# EAGLE board PCB (EAGLE 9.7.0)
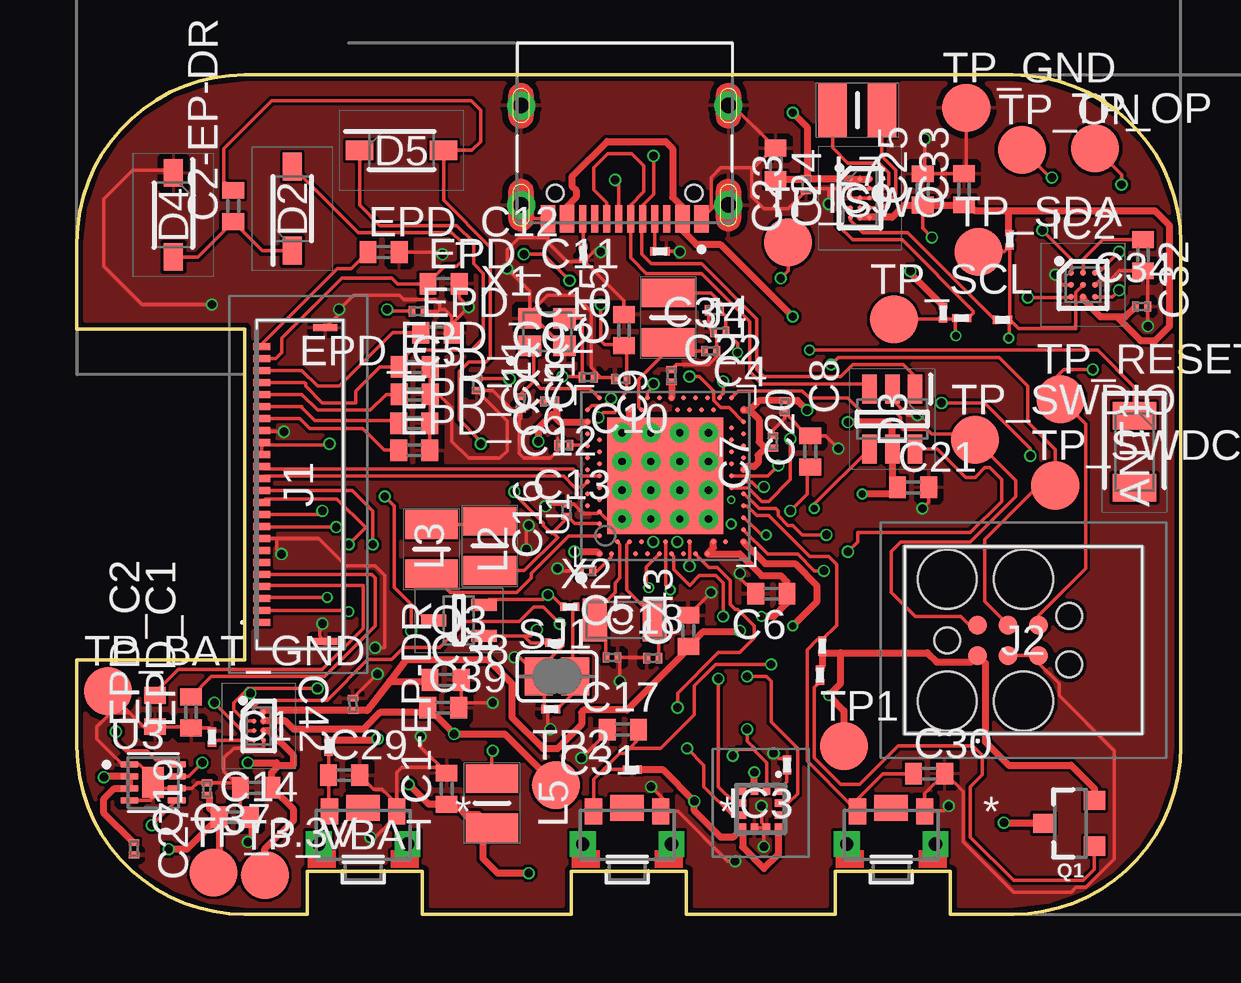
[diagram p0: board, top side]
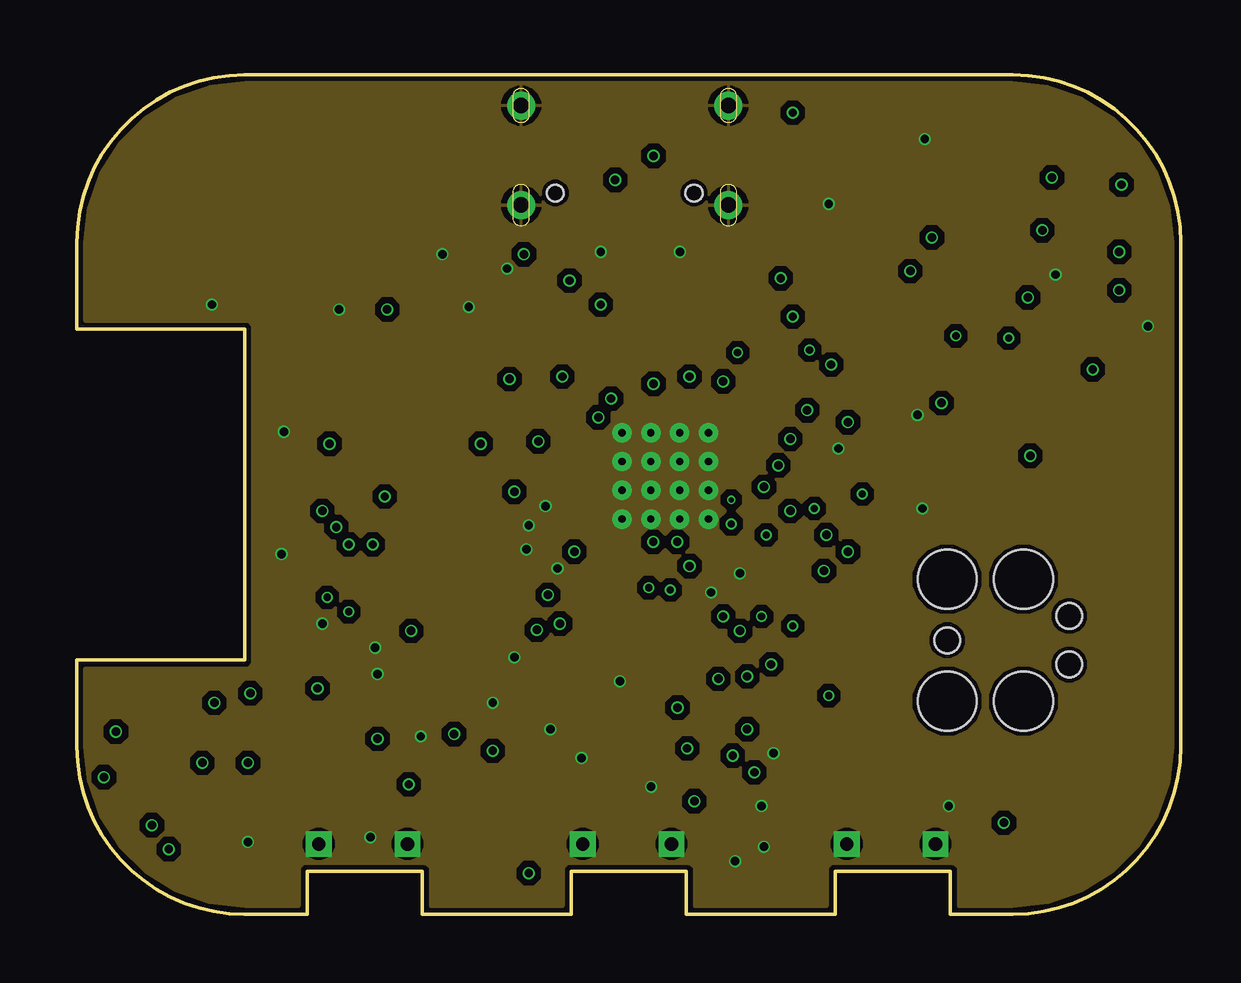
[diagram p1: board, inner layer GND]
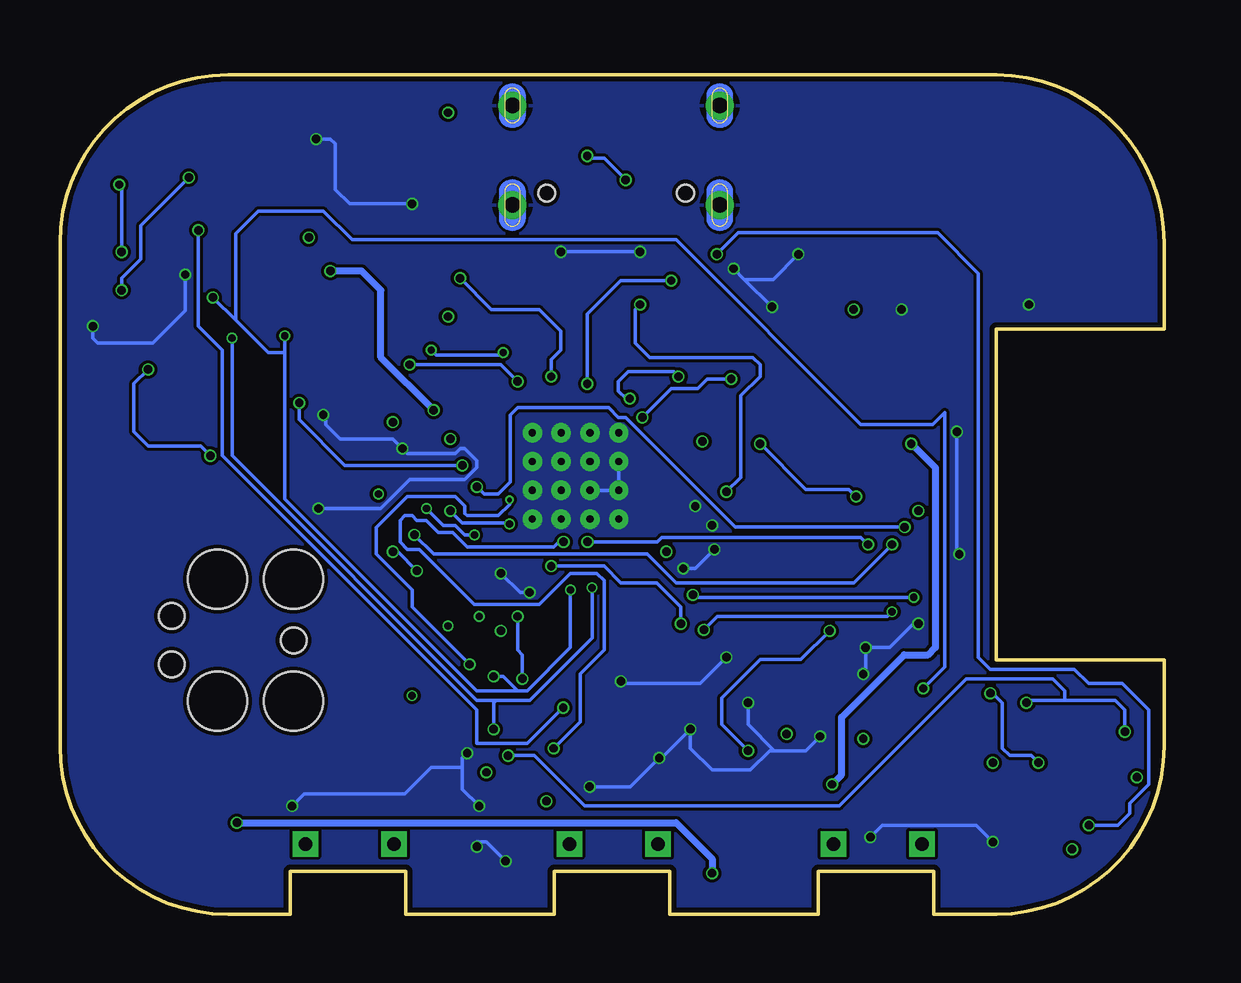
[diagram p2: board, bottom side, seen from below]

Size 46 x 35 mm. Coordinates in mm from the lower left corner, seen from the top.
Outline: 39,0 36.4,0 36.4,1.8 31.6,1.8 31.6,0 25.4,0 25.4,1.8 20.6,1.8 20.6,0 14.4,0 14.4,1.8 9.6,1.8 9.6,0 7,0 arc-90 0,7 0,10.6 7,10.6 7,24.4 0,24.4 0,28 arc-90 7,35 39,35 arc-90 46,28 46,7 arc-90 39,0
Copper layers (1+2*63+16): Top / GND / Bottom / layer 63
Stack-up 4 Layer Stack: Top SilkScreen Epoxy Ink / Top SolderMask User Defined 0.02mm Dk 4.3 / Top Surface Finish Lead-Free 0.02mm / Top User Defined 0.03mm / Dielectric-1 User Defined 0.034mm / Dielectric-2 User Defined 0.034mm / GND User Defined 0.03mm / Dielectric-3 User Defined 0.664mm / Power User Defined 0.03mm / Dielectric-4 User Defined 0.034mm / Dielectric-5 User Defined 0.034mm / Bottom User Defined 0.03mm / Bottom Surface Finish Lead-Free 0.02mm / Bottom SolderMask User Defined 0.02mm Dk 4.3 / Bottom SilkScreen Epoxy Ink
Design rules: minimum copper width 5mil, minimum drill size 0.3mm, copper clearance wire_polygon to wire_polygon 5mil, copper clearance wire_polygon to pad_smd 5mil, copper clearance wire_polygon to via 5mil, copper clearance pad_smd to pad_smd 5mil, copper clearance pad_smd to via 5mil, copper clearance via to via 5mil, copper clearance smd to pad (same net) 5mil, copper clearance smd to via (same net) 5mil, copper clearance smd to smd (same net) 5mil, dimension clearance 0.2mm, via restrict clearance 0mil, restrict clearance 0mil, drill distance 6mil, keepout clearance 0mil

## Footprints (pad centres in the part's own frame; a part is rotated, then mirrored left to right if it is on the bottom)
2450AT18B100E_ANTC3216X140N = smd 1.15 x 1.8: 1 -1.5,0; 2 1.5,0
NORDIC_NRF_3_RESC0201_L = smd 0.28 x 0.43: 1 -0.255,0; 2 0.255,0
ESP32_C6_LIBRARY_1_ESP32_WROVER_EAGLE-LTSPICE_C0402 = smd 0.7 x 0.9: 1 -0.65,0; 2 0.65,0
ESP32_C6_LIBRARY_5_SOD3716X135N = smd 1.15 x 0.8: 1 -1.75,0; 2 1.75,0
ESP32_C6_LIBRARY_3_SOT95P280X145-6N = smd 1.2 x 0.6: 1 -1.25,0.95; 2 -1.25,0; 3 -1.25,-0.95; 4 1.25,-0.95; 5 1.25,0; 6 1.25,0.95
BQ25180YBGR_BGA8C40P2X4_100X155X50 = smd 0.2 x 0.2: A1 -0.2,0.6; A2 0.2,0.6; B1 -0.2,0.2; B2 0.2,0.2; C1 -0.2,-0.2; C2 0.2,-0.2; D1 -0.2,-0.6; D2 0.2,-0.6
DRV2605YZFR_BGA9C50P3X3_144X144X62 = smd 0.25 x 0.25: A1 -0.5,0.5; A2 0,0.5; A3 0.5,0.5; B1 -0.5,0; B2 0,0; B3 0.5,0; C1 -0.5,-0.5; C2 0,-0.5; C3 0.5,-0.5
BMA423_BMA423 = smd 0.3 x 0.35: 1 -0.75,-0.775; 2 -0.25,-0.775; 3 0.25,-0.775; 4 0.75,-0.775; 7 0.75,0.775; 8 0.25,0.775; 9 -0.25,0.775; 10 -0.75,0.775 | smd 0.35 x 0.3: 5 0.775,-0.25; 6 0.775,0.25; 11 -0.775,0.25; 12 -0.775,-0.25
RT6160AWSC_BGA15C40P3X5_140X230X60 = smd 0.216 x 0.216: A1 -0.4,0.8; A2 0,0.8; A3 0.4,0.8; B1 -0.4,0.4; B2 0,0.4; B3 0.4,0.4; C1 -0.4,0; C2 0,0; C3 0.4,0; D1 -0.4,-0.4; D2 0,-0.4; D3 0.4,-0.4; E1 -0.4,-0.8; E2 0,-0.8; E3 0.4,-0.8
503480-2400_5034802400 = smd 0.3 x 0.7: 1 -5.75,1.525; 2 -5.25,1.525; 3 -4.75,1.525; 4 -4.25,1.525; 5 -3.75,1.525; 6 -3.25,1.525; 7 -2.75,1.525; 8 -2.25,1.525; 9 -1.75,1.525; 10 -1.25,1.525; 11 -0.75,1.525; 12 -0.25,1.525; 13 0.25,1.525; 14 0.75,1.525; 15 1.25,1.525; 16 1.75,1.525; 17 2.25,1.525; 18 2.75,1.525; 19 3.25,1.525; 20 3.75,1.525; 21 4.25,1.525; 22 4.75,1.525; 23 5.25,1.525; 24 5.75,1.525 | smd 0.3 x 1: MP1 -6.54,-1.125; MP2 6.54,-1.125
TC2030-IDC_TC2030IDC = smd 0.783 x 0.783: 1 -0.953,-0.635; 2 -0.953,0.635; 3 0.317,-0.635; 4 0.317,0.635; 5 1.588,-0.635; 6 1.588,0.635 | hole 2.451: -2.223,-2.54; -2.223,2.54; 0.952,-2.54; 0.952,2.54 | hole 1.067: -2.223,0; 2.857,-1.016; 2.857,1.016
KH-TYPE-C-16P_KINGHELM_KH-TYPE-C-16P = smd 0.6 x 1.15: A1_B12 -3.2,4.725; A4_B9 -2.4,4.725; A9_B4 2.4,4.725; A12_B1 3.2,4.725 | smd 0.3 x 1.15: A5 -1.25,4.725; A6 -0.25,4.725; A7 0.25,4.725; A8 1.25,4.725; B5 1.75,4.725; B6 0.75,4.725; B7 -0.75,4.725; B8 -1.75,4.725 | drill 0.65 pad 1.05: SH1 -4.32,0; SH2 4.32,0; SH3 -4.32,4.15; SH4 4.32,4.15 | hole 0.7: -2.89,3.65; 2.89,3.65
MLP2016SR47MT0S1_INDC2016X100N = smd 1.2 x 2.2: 1 -1.028,0; 2 1.028,0
ESP32_C6_LIBRARY_4_ESP32_C6_LIBRARY_4_ESP32_C6_LIBRARY_4_ESP32_C6_LIBRARY_4_ESP32_WROVER_SPARKFUN-DISCRETESEMI_SOT23-3 = smd 0.8 x 0.9: 1 -0.95,-1; 2 0.95,-1; 3 0,1.1
ESP32_C6_LIBRARY_6_SOT65P210X110-3N = smd 1.05 x 0.5: 1 -1.05,0.65; 2 -1.05,-0.65; 3 1.05,0
CPF0201D7K68C1_0201 = smd 0.35 x 0.25: 1 0,0.275; 2 0,-0.275
ERA-1AEB3401C_0201 = smd 0.35 x 0.25: 1 0,0.275; 2 0,-0.275
ESP32_C6_LIBRARY_7_JUMPER_SJ = smd 1.168 x 1.6: 1 -0.762,0; 2 0.762,0
2025-10-22_07-23-44_LIBRARY_SW_EVP-AKE31A_PAN = smd 0.711 x 1.092: 1 -1.4,-0.972; 2 1.4,-0.972 | drill 0.559 pad 0.914 square: 3 -1.848,0.381; 4 1.848,0.381 | smd 1.397 x 1.092: 5 0,-1.124
HECTOR_WATCH_1_TP20R = smd 2 x 2: TP 0,0
NORDIC_NRF_4_AQFN50P700X700X85_HS-74N = smd 4.85 x 4.85: P$74 0,0 | drill 0.3 pad 0.6: P$75 -1.8,1.8; P$76 -0.6,1.8; P$77 0.6,1.8; P$78 1.8,1.8; P$79 -1.8,0.6; P$80 -0.6,0.6; P$81 0.6,0.6; P$82 1.8,0.6; P$83 -1.8,-0.6; P$84 -0.6,-0.6; P$85 0.6,-0.6; P$86 1.8,-0.6; P$87 -1.8,-1.8; P$88 -0.6,-1.8; P$89 0.6,-1.8; P$90 1.8,-1.8 | smd 0.2 x 0.2: P$A8 -1.25,3.25; P$A10 -0.75,3.25; P$A12 -0.25,3.25; P$A14 0.25,3.25; P$A16 0.75,3.25; P$A18 1.25,3.25; P$A20 1.75,3.25; P$A22 2.25,3.25; P$A23 2.75,3.25; P$AA24 3.25,-2.25; P$AB2 -2.75,-2.5; P$AC5 -2,-2.75; P$AC9 -1,-2.75; P$AC11 -0.5,-2.75; P$AC13 0,-2.75; P$AC15 0.5,-2.75; P$AC17 1,-2.75; P$AC19 1.5,-2.75; P$AC21 2,-2.75; P$AC24 3.25,-2.75; P$AD2 -2.75,-3.25; P$AD4 -2.25,-3.25; P$AD6 -1.75,-3.25; P$AD8 -1.25,-3.25; P$AD10 -0.75,-3.25; P$AD12 -0.25,-3.25; P$AD14 0.25,-3.25; P$AD16 0.75,-3.25; P$AD18 1.25,-3.25; P$AD20 1.75,-3.25; P$AD22 2.25,-3.25; P$AD23 2.75,-3.25; P$B1 -3.25,2.75; P$B3 -2.5,2.75; P$B5 -2,2.75; P$B7 -1.5,2.75; P$B9 -1,2.75; P$B11 -0.5,2.75; P$B13 0,2.75; P$B15 0.5,2.75; P$B17 1,2.75; P$B19 1.5,2.75; P$B24 3.25,2.75; P$C1 -3.25,2.25; P$D2 -2.75,2; P$D23 2.75,2; P$E24 3.25,1.75; P$F2 -2.75,1.5; P$F23 2.75,1.5; P$G1 -3.25,1.25; P$H2 -2.75,1; P$H23 2.75,1; P$J1 -3.25,0.75; P$J24 3.25,0.75; P$K2 -2.75,0.5; P$L1 -3.25,0.25; P$L24 3.25,0.25; P$M2 -2.75,0; P$N1 -3.25,-0.25; P$N24 3.25,-0.25; P$P2 -2.75,-0.5; P$P23 2.75,-0.5; P$R1 -3.25,-0.75; P$R24 3.25,-0.75; P$T2 -2.75,-1; P$T23 2.75,-1; P$U1 -3.25,-1.25; P$U24 3.25,-1.25; P$V23 2.75,-1.5; P$W1 -3.25,-1.75; P$W24 3.25,-1.75; P$Y2 -2.75,-2; P$Y23 2.75,-2
ESP32_C6_LIBRARY_SON50P200X200X80-9N = smd 0.76 x 0.27: 1 -0.985,0.75; 2 -0.985,0.25; 3 -0.985,-0.25; 4 -0.985,-0.75; 5 0.985,-0.75; 6 0.985,-0.25; 7 0.985,0.25; 8 0.985,0.75 | smd 0.9 x 1.3: 9 0,0
NORDIC_NRF_BT-XTAL_2016_N = smd 0.95 x 0.85: 1 -0.725,-0.575; 2 0.725,-0.575; 3 0.725,0.575; 4 -0.725,0.575
NORDIC_NRF_1_XTAL_3215_N = smd 1 x 1.8: 1 -1.25,0; 2 1.25,0

## Placement (x,y rotation side)
ANT1  2450AT18B100E  [2450AT18B100E_ANTC3216X140N]  44.07,19.28 270 top
C1  12pF  [NORDIC_NRF_3_RESC0201_L]  18.5,21.32 270 top
C1-EP-DR  10uF  [ESP32_C6_LIBRARY_1_ESP32_WROVER_EAGLE-LTSPICE_C0402]  15.41,5.24 90 top
C2  12pF  [NORDIC_NRF_3_RESC0201_L]  21.31,22.39 0 top
C2-EP-DR  4.7uF/25V  [ESP32_C6_LIBRARY_1_ESP32_WROVER_EAGLE-LTSPICE_C0402]  6.52,29.53 90 top
C3  1pF  [NORDIC_NRF_3_RESC0201_L]  26.41,23.48 0 top
C4  1pF  [NORDIC_NRF_3_RESC0201_L]  26.79,24.28 180 top
C5  100nF  [NORDIC_NRF_3_RESC0201_L]  21.24,14.32 180.3 top
C6  4.7uF  [ESP32_C6_LIBRARY_1_ESP32_WROVER_EAGLE-LTSPICE_C0402]  28.94,13.37 180 top
C7  100nF  [NORDIC_NRF_3_RESC0201_L]  29.01,19.7 90 top
C8  100nF  [NORDIC_NRF_3_RESC0201_L]  29.5,21.17 270 top
C9  820pF  [NORDIC_NRF_3_RESC0201_L]  24.78,22.46 90 top
C10  N.C.  [NORDIC_NRF_3_RESC0201_L]  22.67,22.32 180 top
C11  100pF  [NORDIC_NRF_3_RESC0201_L]  16.67,22.09 270 top
C12  100nF  [NORDIC_NRF_3_RESC0201_L]  19.7,21.38 180 top
C13  N.C.  [NORDIC_NRF_3_RESC0201_L]  20.29,19.56 180 top
C14  4.7uF  [ESP32_C6_LIBRARY_1_ESP32_WROVER_EAGLE-LTSPICE_C0402]  6.58,4.06 0 top
C15  1.0uF  [ESP32_C6_LIBRARY_1_ESP32_WROVER_EAGLE-LTSPICE_C0402]  22.8,24.36 90 top
C16  47nF  [NORDIC_NRF_3_RESC0201_L]  20.4,16.85 90 top
C17  12pF  [NORDIC_NRF_3_RESC0201_L]  22.3,10.71 180 top
C18  12pF  [NORDIC_NRF_3_RESC0201_L]  24,10.68 0 top
C19  100nF  [NORDIC_NRF_3_RESC0201_L]  5.42,5.23 90 top
C20  4.7uF  [ESP32_C6_LIBRARY_1_ESP32_WROVER_EAGLE-LTSPICE_C0402]  30.56,19.3 90 top
C21  4.7uF  [ESP32_C6_LIBRARY_1_ESP32_WROVER_EAGLE-LTSPICE_C0402]  34.85,17.8 0 top
C22  N.C.  [NORDIC_NRF_3_RESC0201_L]  26.56,25.18 180 top
C23  0.1uF  [NORDIC_NRF_3_RESC0201_L]  30.39,30.42 90 top
C24  10uF  [ESP32_C6_LIBRARY_1_ESP32_WROVER_EAGLE-LTSPICE_C0402]  29.12,31.29 270 top
C25  22uF  [ESP32_C6_LIBRARY_1_ESP32_WROVER_EAGLE-LTSPICE_C0402]  35.25,30.22 90 top
C27  0.1uF  [NORDIC_NRF_3_RESC0201_L]  2.38,2.74 270 top
C29  1uF  [ESP32_C6_LIBRARY_1_ESP32_WROVER_EAGLE-LTSPICE_C0402]  11.14,5.81 0 top
C30  1uF  [ESP32_C6_LIBRARY_1_ESP32_WROVER_EAGLE-LTSPICE_C0402]  35.51,5.87 0 top
C31  1uF  [ESP32_C6_LIBRARY_1_ESP32_WROVER_EAGLE-LTSPICE_C0402]  22.75,7.71 180 top
C32  1uF  [ESP32_C6_LIBRARY_1_ESP32_WROVER_EAGLE-LTSPICE_C0402]  44.43,27.48 270 top
C33  22uF  [ESP32_C6_LIBRARY_1_ESP32_WROVER_EAGLE-LTSPICE_C0402]  36.97,30.23 90 top
C34  0.1uF  [NORDIC_NRF_3_RESC0201_L]  44.37,25.34 0 top
C37  1uF  [ESP32_C6_LIBRARY_1_ESP32_WROVER_EAGLE-LTSPICE_C0402]  7.47,5.28 180 top
C38  1uF  [ESP32_C6_LIBRARY_1_ESP32_WROVER_EAGLE-LTSPICE_C0402]  15.37,9.77 0 top
C39  10uF  [ESP32_C6_LIBRARY_1_ESP32_WROVER_EAGLE-LTSPICE_C0402]  15.27,8.62 0 top
C42  0.1uF  [NORDIC_NRF_3_RESC0201_L]  11.51,8.75 91.1 top
C43  4.7uF  [ESP32_C6_LIBRARY_1_ESP32_WROVER_EAGLE-LTSPICE_C0402]  25.48,11.82 90 top
D2  MBR0530  [ESP32_C6_LIBRARY_5_SOD3716X135N]  8.98,29.42 90 top
D3  USBLC6-2SC6Y  [ESP32_C6_LIBRARY_3_SOT95P280X145-6N]  33.98,20.65 270 top
D4  MBR0530  [ESP32_C6_LIBRARY_5_SOD3716X135N]  4.02,29.16 270 top
D5  MBR0530  [ESP32_C6_LIBRARY_5_SOD3716X135N]  13.53,31.85 0 top
EPD_C1  1uF/50V  [ESP32_C6_LIBRARY_1_ESP32_WROVER_EAGLE-LTSPICE_C0402]  4.76,8.42 90 top
EPD_C2  1uF/50V  [ESP32_C6_LIBRARY_1_ESP32_WROVER_EAGLE-LTSPICE_C0402]  3.26,8.47 90 top
EPD_C5  0.1uF/50V  [NORDIC_NRF_3_RESC0201_L]  14.22,25.14 180 top
EPD_C6  1uF/50V  [ESP32_C6_LIBRARY_1_ESP32_WROVER_EAGLE-LTSPICE_C0402]  14.06,19.35 0 top
EPD_C7  1uF/50V  [ESP32_C6_LIBRARY_1_ESP32_WROVER_EAGLE-LTSPICE_C0402]  14.06,20.48 0 top
EPD_C8  1uF/50V  [ESP32_C6_LIBRARY_1_ESP32_WROVER_EAGLE-LTSPICE_C0402]  14.08,21.67 0 top
EPD_C9  1uF/50V  [ESP32_C6_LIBRARY_1_ESP32_WROVER_EAGLE-LTSPICE_C0402]  14.08,22.82 0 top
EPD_C10  1uF/50V  [ESP32_C6_LIBRARY_1_ESP32_WROVER_EAGLE-LTSPICE_C0402]  14.98,24.25 0 top
EPD_C11  1uF/50V  [ESP32_C6_LIBRARY_1_ESP32_WROVER_EAGLE-LTSPICE_C0402]  15.28,26.28 0 top
EPD_C12  1uF/50V  [ESP32_C6_LIBRARY_1_ESP32_WROVER_EAGLE-LTSPICE_C0402]  12.78,27.61 0 top
IC1  BQ25180YBGR_BQ25180YBGR  [BQ25180YBGR_BGA8C40P2X4_100X155X50]  7.58,7.86 0 top
IC2  DRV2605YZFR  [DRV2605YZFR_BGA9C50P3X3_144X144X62]  41.93,26.24 0 top
IC3  BMA423  [BMA423_BMA423]  28.49,4.39 180 top
IC9  RT6160AWSC  [RT6160AWSC_BGA15C40P3X5_140X230X60]  32.63,29.86 0 top
J1  503480-2400  [503480-2400_5034802400]  9.23,17.92 90 top
J2  TC2030-IDC  [TC2030-IDC_TC2030IDC]  38.49,11.43 0 top
J4  KH-TYPE-C-16P  [KH-TYPE-C-16P_KINGHELM_KH-TYPE-C-16P]  22.83,33.72 180 top
L1  3.9nH  [MLP2016SR47MT0S1_INDC2016X100N]  24.65,24.88 90 top
L2  10uH  [MLP2016SR47MT0S1_INDC2016X100N]  14.78,15.23 90 top
L3  15nH  [MLP2016SR47MT0S1_INDC2016X100N]  17.21,15.36 270 top
L5  68uH  [MLP2016SR47MT0S1_INDC2016X100N]  17.3,4.63 90 top
L7  FTC252012SR47MBCA  [MLP2016SR47MT0S1_INDC2016X100N]  32.52,33.53 0 top
Q1  20V/4.2A/52mΩ/1.4W  [ESP32_C6_LIBRARY_4_ESP32_C6_LIBRARY_4_ESP32_C6_LIBRARY_4_ESP32_C6_LIBRARY_4_ESP32_WROVER_SPARKFUN-DISCRETESEMI_SOT23-3]  41.4,3.8 90 top
Q3  SI1308EDL  [ESP32_C6_LIBRARY_6_SOT65P210X110-3N]  15.92,12.26 180 top
R1_EP_DR  0.47  [CPF0201D7K68C1_0201]  20.54,12.82 270 top
R1_USB  5K1  [CPF0201D7K68C1_0201]  24.3,27.64 270 top
R2  0  [ERA-1AEB3401C_0201]  38.57,24.78 90 top
R2_EP_DR  10K  [CPF0201D7K68C1_0201]  19.92,11.32 270 top
R2_USB  5K1  [CPF0201D7K68C1_0201]  21.1,27.55 1.4 top
R3  0  [CPF0201D7K68C1_0201]  29.59,6.23 180 top
R4  0  [ERA-1AEB3401C_0201]  36.87,24.86 270 top
R5  10k  [CPF0201D7K68C1_0201]  31.06,11.18 0 top
R7  10k  [CPF0201D7K68C1_0201]  10.48,7.01 180 top
R8  10k  [CPF0201D7K68C1_0201]  23.14,6.04 90 top
R9  10K  [CPF0201D7K68C1_0201]  5.64,7.39 0 top
R17  3K3  [CPF0201D7K68C1_0201]  36.1,25.08 0 top
R18  3K3  [CPF0201D7K68C1_0201]  38.87,28.12 0 top
R_PWR_EPD  10K  [CPF0201D7K68C1_0201]  30.97,9.97 180 top
R_TYPE_SEL  2.2  [CPF0201D7K68C1_0201]  19.75,8.56 90 top
SJ1  0  [ESP32_C6_LIBRARY_7_JUMPER_SJ]  20.01,9.92 0 top
SW_DN  2025-10-22_07-23-44_LIBRARY_EVP-AKE31ASW_EVP-AKE31A_PAN  [2025-10-22_07-23-44_LIBRARY_SW_EVP-AKE31A_PAN]  11.93,3.32 180 top
SW_ENT  2025-10-22_07-23-44_LIBRARY_EVP-AKE31ASW_EVP-AKE31A_PAN  [2025-10-22_07-23-44_LIBRARY_SW_EVP-AKE31A_PAN]  22.93,3.32 180 top
SW_UP  2025-10-22_07-23-44_LIBRARY_EVP-AKE31ASW_EVP-AKE31A_PAN  [2025-10-22_07-23-44_LIBRARY_SW_EVP-AKE31A_PAN]  33.93,3.32 180 top
TP1  HECTOR_WATCH_1_TPTP20R  [HECTOR_WATCH_1_TP20R]  31.96,7.01 0 top
TP2  HECTOR_WATCH_1_TPTP20R  [HECTOR_WATCH_1_TP20R]  19.96,5.39 0 top
TP_3.3V  HECTOR_WATCH_1_TPTP20R  [HECTOR_WATCH_1_TP20R]  5.7,1.75 0 top
TP_BAT_GND  HECTOR_WATCH_1_TPTP20R  [HECTOR_WATCH_1_TP20R]  1.3,9.31 0 top
TP_GND  HECTOR_WATCH_1_TPTP20R  [HECTOR_WATCH_1_TP20R]  37.06,33.62 0 top
TP_ON  HECTOR_WATCH_1_TPTP20R  [HECTOR_WATCH_1_TP20R]  39.38,31.87 0 top
TP_OP  HECTOR_WATCH_1_TPTP20R  [HECTOR_WATCH_1_TP20R]  42.43,31.93 0 top
TP_RESET  HECTOR_WATCH_1_TPTP20R  [HECTOR_WATCH_1_TP20R]  40.99,21.48 0 top
TP_SCL  HECTOR_WATCH_1_TPTP20R  [HECTOR_WATCH_1_TP20R]  34.05,24.81 0 top
TP_SDA  HECTOR_WATCH_1_TPTP20R  [HECTOR_WATCH_1_TP20R]  37.57,27.62 0 top
TP_SWDCLK  HECTOR_WATCH_1_TPTP20R  [HECTOR_WATCH_1_TP20R]  40.77,17.88 0 top
TP_SWDIO  HECTOR_WATCH_1_TPTP20R  [HECTOR_WATCH_1_TP20R]  37.43,19.78 0 top
TP_SWO  HECTOR_WATCH_1_TPTP20R  [HECTOR_WATCH_1_TP20R]  29.64,28.01 0 top
TP_VBAT  HECTOR_WATCH_1_TPTP20R  [HECTOR_WATCH_1_TP20R]  7.84,1.64 0 top
U1  NRF52840_QF  [NORDIC_NRF_4_AQFN50P700X700X85_HS-74N]  24.52,18.28 90 top
U3  MAX17048G+T10  [ESP32_C6_LIBRARY_SON50P200X200X80-9N]  3.18,5.5 0 top
X1  32MHz  [NORDIC_NRF_BT-XTAL_2016_N]  19.6,24.28 0 top
X2  32.768kHz  [NORDIC_NRF_1_XTAL_3215_N]  22.84,12.28 0 top

## Library data of the parts
ANT1 = InkTime_v5; ARROW_PART_NUMBER: 2450AT18B100E; ARROW_PRICE-STOCK: https://www.arrow.com/en/products/2450at18b100e/johanson-dielectrics?utm_currency=USD&region=nac; DESCRIPTION: Antennas 2.45GHz ANTENNA; HEIGHT: 1.4mm; MANUFACTURER_NAME: JOHANSON TECHNOLOGY; MANUFACTURER_PART_NUMBER: 2450AT18B100E; MOUSER_PART_NUMBER: 609-2450AT18B100E; MOUSER_PRICE-STOCK: https://www.mouser.co.uk/ProductDetail/Johanson-Technology/2450AT18B100E?qs=yCnrNFeXz%252Bh5MFsFIXGZGA%3D%3D
C1-C5 C7-C13 C16-C19 C22 C23 C27 C34 C42 EPD_C5 R1_EP_DR R1_USB R2 R2_EP_DR R2_USB R3-R5 R7-R9 R17 R18 R_PWR_EPD R_TYPE_SEL SJ1 TP1 TP2 TP_3.3V TP_BAT_GND TP_GND TP_ON TP_OP TP_RESET TP_SCL TP_SDA TP_SWDCLK TP_SWDIO TP_SWO TP_VBAT U1 X1 X2 = InkTime_v5
C1-EP-DR C2-EP-DR C6 C14 C15 C20 C21 C24 C25 C29-C33 C37-C39 C43 EPD_C1 EPD_C2 EPD_C6-EPD_C12 = InkTime_v5; SPICEMODEL: NONE; SPICEPREFIX: C
D2 D4 D5 = InkTime_v5; AVAILABILITY: In Stock; CHECK_PRICES: https://www.snapeda.com/parts/MBR0530/Onsemi/view-part/?ref=eda; DESCRIPTION: Diode Schottky 30 V 500mA Surface Mount SOD-123; MF: ON Semiconductor; MP: MBR0530; PACKAGE: SOD-123-2 ON Semiconductor; PRICE: None; PURCHASE-URL: https://www.snapeda.com/api/url_track_click_mouser/?unipart_id=179458&manufacturer=ON Semiconductor&part_name=MBR0530&search_term=None; SNAPEDA_LINK: https://www.snapeda.com/parts/MBR0530/Onsemi/view-part/?ref=snap
D3 = InkTime_v5; AVAILABILITY: In Stock; CHECK_PRICES: https://www.snapeda.com/parts/USBLC6-2SC6Y/STMicroelectronics/view-part/?ref=eda; DESCRIPTION: 17V Clamp 5A (8/20µs) Ipp Tvs Diode Surface Mount SOT-23-6; MF: STMicroelectronics; MP: USBLC6-2SC6Y; PACKAGE: SOT-23-6 STMicroelectronics; PRICE: None; SNAPEDA_LINK: https://www.snapeda.com/parts/USBLC6-2SC6Y/STMicroelectronics/view-part/?ref=snap
IC1 = InkTime_v5; ARROW_PART_NUMBER: BQ25180YBGR; ARROW_PRICE-STOCK: https://www.arrow.com/en/products/bq25180ybgr/texas-instruments?utm_currency=USD&region=nac; DESCRIPTION: Charger IC Lithium Ion/Polymer, Lithium Iron Phosphate 8-DSBGA (1.6x1.1); HEIGHT: 0.5mm; MANUFACTURER_NAME: Texas Instruments; MANUFACTURER_PART_NUMBER: BQ25180YBGR; MOUSER_PART_NUMBER: 595-BQ25180YBGR; MOUSER_PRICE-STOCK: https://www.mouser.co.uk/ProductDetail/Texas-Instruments/BQ25180YBGR?qs=doiCPypUmgEWjAK%252BJAX6Tw%3D%3D
IC2 = InkTime_v5; ARROW_PART_NUMBER: DRV2605YZFR; ARROW_PRICE-STOCK: https://www.arrow.com/en/products/drv2605yzfr/texas-instruments?region=nac; DESCRIPTION: Haptic Driver for ERM/LRA with Built-In Library and Smart Loop Architecture; HEIGHT: 0.625mm; MANUFACTURER_NAME: Texas Instruments; MANUFACTURER_PART_NUMBER: DRV2605YZFR
IC3 = InkTime_v5; ARROW_PART_NUMBER: BMA423; ARROW_PRICE-STOCK: https://www.arrow.com/en/products/bma423/bosch; DESCRIPTION: Accelerometers Triaxial low-g 12bit Acceleration Sensor; HEIGHT: 1mm; MANUFACTURER_NAME: BOSCH; MANUFACTURER_PART_NUMBER: BMA423; MOUSER_PART_NUMBER: 262-BMA423; MOUSER_PRICE-STOCK: https://www.mouser.co.uk/ProductDetail/Bosch-Sensortec/BMA423?qs=HXFqYaX1Q2xC%252BSgeGoX3mg%3D%3D
IC9 = InkTime_v5; DESCRIPTION: Buck-Boost Regulator Positive Output Step-Up/Step-Down I2C DC-DC Controller IC 15-WL-CSP (BSC) (1.4x2.3); HEIGHT: 0.6mm; MANUFACTURER_NAME: RICHTEK; MANUFACTURER_PART_NUMBER: RT6160AWSC; MOUSER_PART_NUMBER: 835-RT6160AWSC; MOUSER_PRICE-STOCK: https://www.mouser.co.uk/ProductDetail/Richtek/RT6160AWSC?qs=amGC7iS6iy%2FLd9PSoixZXQ%3D%3D
J1 = InkTime_v5; DESCRIPTION: FFC & FPC Connectors 0.5mm FPC RA SMT Dual Contact 24Ckt; HEIGHT: 1.87mm; MANUFACTURER_NAME: Molex; MANUFACTURER_PART_NUMBER: 503480-2400; MOUSER_PART_NUMBER: 538-503480-2400; MOUSER_PRICE-STOCK: https://www.mouser.co.uk/ProductDetail/Molex/503480-2400?qs=OAhjpuo3Vu7efIoxFh9AOw%3D%3D
J2 = InkTime_v5; DESCRIPTION: CABLE ADAPTER 6 POS; HEIGHT: 19mm; MANUFACTURER_NAME: Tag Connect; MANUFACTURER_PART_NUMBER: TC2030-IDC
J4 = InkTime_v5; AVAILABILITY: Not in stock; CHECK_PRICES: https://www.snapeda.com/parts/KH-TYPE-C-16P/Kinghelm/view-part/?ref=eda; MF: kinghelm; MP: KH-TYPE-C-16P; PACKAGE: None; PRICE: None; SNAPEDA_LINK: https://www.snapeda.com/parts/KH-TYPE-C-16P/Kinghelm/view-part/?ref=snap
L1-L3 L5 L7 = InkTime_v5; DESCRIPTION: SMD / SMT Inductors (Coils), L=0.47?H, L x W x T :; HEIGHT: 1mm; JLCPCB: https://jlcpcb.com/partdetail/6763488-FTC252012SR47MBCA/C5832368; MANUFACTURER_NAME: TDK; MANUFACTURER_PART_NUMBER: FTC252012SR47MBCA
Q1 = InkTime_v5; PROD_ID: TRAN-14388
Q3 = InkTime_v5; AVAILABILITY: In Stock; CHECK_PRICES: https://www.snapeda.com/parts/SI1308EDL-T1-GE3/Vishay+Siliconix/view-part/?ref=eda; DESCRIPTION: Si1308EDL-T1-GE3 N-channel MOSFET Transistor, 1.5 A, 30 V, 3-Pin SC-70 | Siliconix / Vishay SI1308EDL-T1-GE3; MF: Vishay Siliconix; MP: SI1308EDL-T1-GE3; PACKAGE: SOT-323 Vishay Semiconductor; PRICE: None; PURCHASE-URL: https://www.snapeda.com/api/url_track_click_mouser/?unipart_id=274603&manufacturer=Vishay Siliconix&part_name=SI1308EDL-T1-GE3&search_term=None; SNAPEDA_LINK: https://www.snapeda.com/parts/SI1308EDL-T1-GE3/Vishay+Siliconix/view-part/?ref=snap
SW_DN SW_ENT SW_UP = InkTime_v5; COPYRIGHT: Copyright (C) 2025 Ultra Librarian. All rights reserved.; DIGI-KEY_PART_NUMBER_1: P123437TR-ND; DIGI-KEY_PART_NUMBER_2: P123437CT-ND; DIGI-KEY_PART_NUMBER_3: P123437DKR-ND; MANUFACTURER_NAME: Panasonic; MANUFACTURER_PART_NUMBER: EVP-AKE31A
U3 = InkTime_v5; AVAILABILITY: In Stock; CHECK_PRICES: https://www.snapeda.com/parts/MAX17048G+T10/Analog+Devices/view-part/?ref=eda; DESCRIPTION: 3µA 1-Cell/2-Cell Fuel Gauge with ModelGauge; MF: Analog Devices; MP: MAX17048G+T10; PACKAGE: TDFN-8 Maxim; PRICE: None; PURCHASE-URL: https://www.snapeda.com/api/url_track_click_mouser/?unipart_id=329239&manufacturer=Analog Devices&part_name=MAX17048G+T10&search_term=None; SNAPEDA_LINK: https://www.snapeda.com/parts/MAX17048G+T10/Analog+Devices/view-part/?ref=snap

## Nets
3V3: C6.1 C7.1 C8.1 C12.1 C14.1 C19.1 C25.1 C33.1 C34.1 IC2.C2 IC3.3 IC3.7 IC3.10 IC9.E2 IC9.E3 J2.1 Q1.2 R5.2 R7.2 R8.2 R17.1 R18.1 R_PWR_EPD.2 TP1.TP TP_3.3V.TP U1.P$A22 U1.P$AD14 U1.P$AD23 U1.P$B1 U1.P$W1 U1.P$Y2
ALERT: U1.P$J24 U3.5
D+: D3.4 U1.P$AD6
D-: D3.6 U1.P$AD4
DEC3: C11.1 U1.P$D23
DEC4_6: C10.1 C15.1 C16.1 L3.2 U1.P$B5 U1.P$E24
DN: D3.1 J4.A7 J4.B7
DP: D3.3 J4.A6 J4.B6
EPD_3V3: C1-EP-DR.1 EPD_C5.2 J1.15 J1.16 L5.1 Q1.3
EPD_BUSY: J1.9 U1.P$AD12
EPD_CS: J1.12 U1.P$K2
EPD_DC: J1.11 U1.P$AD10
EPD_RST: J1.10 U1.P$AC11
GDR: J1.2 Q3.1 R2_EP_DR.2
GND: C1-EP-DR.2 C1.2 C2.2 C3.2 C4.2 C5.2 C6.2 C7.2 C8.2 C9.2 C10.2 C11.2 C12.2 C13.2 C14.2 C15.2 C16.2 C17.1 C18.1 C19.2 C20.2 C21.2 C22.2 C23.1 C24.1 C25.2 C27.2 C29.2 C30.2 C31.2 C32.2 C33.2 C34.2 C37.2 C38.2 C39.2 C42.2 C43.2 D3.2 D4.1 EPD_C1.1 EPD_C2.1 EPD_C5.1 EPD_C6.2 EPD_C7.2 EPD_C8.2 EPD_C9.2 EPD_C10.2 EPD_C11.2 EPD_C12.2 IC1.D2 IC2.B1 IC2.B3 IC3.8 IC3.9 IC9.B1 IC9.C1 IC9.C2 IC9.C3 J1.8 J1.17 J1.MP1 J1.MP2 J2.3 J2.5 J4.A1_B12 J4.A12_B1 J4.SH1 J4.SH2 J4.SH3 J4.SH4 R1_USB.1 R2_EP_DR.1 R2_USB.2 R3.2 R9.1 R_TYPE_SEL.1 SJ1.1 SW_DN.1 SW_ENT.1 SW_UP.1 TP_BAT_GND.TP TP_GND.TP U1.P$74 U1.P$75 U1.P$76 U1.P$77 U1.P$78 U1.P$79 U1.P$80 U1.P$81 U1.P$82 U1.P$83 U1.P$84 U1.P$85 U1.P$86 U1.P$87 U1.P$88 U1.P$89 U1.P$90 U1.P$B7 U1.P$F23 U3.1 U3.4 U3.6 U3.9 X1.2 X1.4
HAPTIC_EN: IC2.A1 U1.P$U1
IMU_INT1: IC3.5 U1.P$N1
IMU_INT2: IC3.6 U1.P$P2
LX1: IC9.B2 IC9.B3 L7.1
LX2: IC9.D2 IC9.D3 L7.2
MOSI: J1.14 U1.P$B13
N$1: IC9.D1 R4.1
N$2: IC9.E1 R2.1
N$3: C5.1 U1.P$C1
N$4: C20.1 U1.P$AC5
N$5: C3.1 L1.1 U1.P$H23
N$6: ANT1.1 C4.1 C22.1 L1.2
N$7: IC1.D1 R9.2
N$8: C1.1 U1.P$B24 X1.1
N$9: C2-EP-DR.2 D5.2 L5.2 Q3.3
N$10: C2.1 U1.P$A23 X1.3
N$11: L2.1 U1.P$B3
N$12: C13.1 U1.P$A18
N$13: L2.2 L3.1
N$14: C2-EP-DR.1 D2.1 D4.2
N$15: C9.1 U1.P$N24
N$17: EPD_C1.2 J1.5
N$18: R1_EP_DR.1 R_TYPE_SEL.2 SJ1.2
N$19: EPD_C2.2 J1.4
N$20: C32.1 IC2.A2
N$21: IC3.1 R3.1
N$22: EPD_C6.1 J1.18
N$23: EPD_C7.1 J1.19
N$24: EPD_C8.1 J1.20
N$25: J4.A5 R1_USB.2
N$26: EPD_C10.1 J1.22
N$27: J4.B5 R2_USB.1
N$28: EPD_C12.1 J1.24
OUT+: IC2.A3 TP_OP.TP
OUT-: IC2.C3 TP_ON.TP
P0.00/XL1: C17.2 U1.P$D2 X2.1
P0.01/XL2: C18.2 U1.P$F2 X2.2
P0.04: U1.P$J1
P0.09: U1.P$L24
P0.13: C30.1 R5.1 SW_UP.2 U1.P$AD8
P0.14: C31.1 R8.1 SW_ENT.2 U1.P$AC9
P0.19: U1.P$AC15
P0.20: U1.P$AD16
P0.21: U1.P$AC17
P0.22: U1.P$AD18
P0.23: U1.P$AC19
P0.24: U1.P$AD20
P0.25: U1.P$AC21
P0.26: U1.P$G1
P0.27: U1.P$H2
P0.28: U1.P$B11
P0.29: U1.P$A10
P0.30: U1.P$B9
P0.31: U1.P$A8
P1.01: Q1.1 R_PWR_EPD.1
P1.01/2.4B: U1.P$Y23
P1.02: C29.1 R7.1 SW_DN.2
P1.02/2.8C: U1.P$W24
P1.03: U1.P$V23
P1.04: U1.P$U24
P1.05: U1.P$T23
P1.06: U1.P$R24
P1.07: U1.P$P23
P1.09: U1.P$R1
P1.10: U1.P$A20
P1.11: U1.P$B19
P1.12: U1.P$B17
P1.13: U1.P$A16
P1.14: U1.P$B15
P1.15: U1.P$A14
PMIC_INT: IC1.A1 U1.P$T2
PREVGH: D5.1 EPD_C9.1 J1.21
PREVGL: D2.2 EPD_C11.1 J1.23
RESE: J1.3 Q3.2 R1_EP_DR.2
RESET: J2.6 TP_RESET.TP U1.P$AC13
SCK: J1.13 U1.P$A12
SCL: IC1.B1 IC2.C1 IC3.12 R4.2 R17.2 TP_SCL.TP U1.P$M2 U3.7
SDA: IC1.C1 IC2.B2 IC3.2 R2.2 R18.2 TP_SDA.TP U1.P$L1 U3.8
SWDCLK: J2.4 TP_SWDCLK.TP U1.P$AA24
SWDIO: J2.2 TP_SWDIO.TP U1.P$AC24
SWO: TP_SWO.TP U1.P$AD22
VBAT: C27.1 C37.1 IC1.C2 TP_VBAT.TP U3.2 U3.3
VBUS: C21.1 C38.1 C42.1 C43.1 D3.5 IC1.A2 J4.A4_B9 J4.A9_B4 U1.P$AD2
VREG: C23.2 C24.2 C39.1 IC1.B2 IC9.A1 IC9.A2 IC9.A3 TP2.TP

## Tracks (layer width: path | path; a pad name or v marks a point on that pad's centre or on a via)
3V3  (via drill 0.3, 0.35)
  Top 0.15: v35.63,28.22 35.25,28.6 C25.1 | 37.17,29.58 C33.1
  Top 0.3: R7.2 12.5,7.29 v12.53,7.32 | v20.73,15.12 21.68,15.12 U1.P$B1 | C7.1 28.68,19.45 | 28.03,21.02 28.43,21.42 C8.1 30.02,21.43 v30.43,21.02 | 28.03,21.02 U1.P$AD23 27.79,21.06 | C12.1 20.02,20.63 | 20.02,20.63 20.12,20.53 U1.P$A22 | 20.02,20.63 19.8,20.85 19.23,20.27 v19.23,19.72 | 31.83,10.91 R5.2 31.06,10.34 R_PWR_EPD.2 | 31.83,10.91 35.44,10.91 35.83,10.52 37.26,10.52 J2.1 37.86,10.47 37.86,7.19 38.83,6.22 41.43,6.22 42.4,5.25 Q1.2 | v28.53,12.42 29.03,12.42 29.59,12.98 C6.1 29.59,13.86 29.33,14.12 28.53,14.12 27.62,15.03 U1.P$W1 26.52,15.28 U1.P$Y2 | 31.83,10.91 31.83,9.62 v31.33,9.12 31.96,8.49 TP1.TP | C33.1 C25.1 34.48,29.57 33.97,29.06 IC9.E3 IC9.E2 | IC2.C2 41.93,25.64 42.65,24.92 43.33,24.92 | 43.33,24.92 43.69,24.92 C34.1 | IC3.3 v28.23,5.92 | 43.33,24.92 44.33,23.92 44.93,23.92 45.53,24.52 45.53,28.72 44.93,29.32 38.83,29.32 | 38.83,29.32 37.43,29.32 37.17,29.58 | R18.1 38.83,28.44 38.83,29.32 | C19.1 5.53,4.87 5.53,4.42 5.89,4.06 C14.1 | R8.2 24.41,6.04 v25.73,4.72 25.73,4.32 26.83,3.22 27.34,3.22 IC3.7 27.74,2.81 28.63,1.92 29.24,2.53 IC3.10 | C14.1 5.93,1.97 TP_3.3V.TP | C14.1 4.59,2.72 v3.83,2.72 | R17.1 34.73,26.72 v34.73,26.82 | 27.79,21.06 | 28.03,21.02 28.43,20.62 28.43,19.7 28.68,19.45 | 28.68,19.45 28.39,19.15 28.39,18.83 28.22,18.66 27.9,18.66 U1.P$AD14
  Bottom 0.3: v30.43,21.02 32.63,23.22 32.63,26.02 33.43,26.82 v34.73,26.82
  Power 0.3: 13.33,6.72 13.13,6.72 v12.53,7.32 | 13.33,6.72 16.23,6.72 18.58,9.07 | 18.58,9.07 21.83,12.32 21.83,15.02 21.63,15.22 21.53,15.22 | v20.73,15.12 21.53,15.12 21.53,15.22 | v28.53,12.42 30.03,10.92 30.03,9.62 30.43,9.22 | 30.43,9.22 30.53,9.12 v31.33,9.12 31.43,9.02 32.93,9.02 34.43,10.52 34.43,17.32 38.03,20.92 38.03,24.92 35.18,27.77 | 30.43,9.22 28.23,7.02 v28.23,5.92 26.93,5.92 26.73,5.72 | v25.73,4.72 26.73,5.72 | v3.83,2.72 6.73,5.62 12.23,5.62 13.33,6.72 | v19.23,19.72 19.23,18.32 21.53,16.02 21.53,15.22 | v34.73,26.82 34.73,27.32 35.18,27.77 | 35.18,27.77 v35.63,28.22 | 18.58,9.07 21.78,9.07 25.13,5.72 26.73,5.72
ALERT  (via drill 0.35)
  Top 0.15: U1.P$J24 23.77,21.76 24.03,22.02 v24.03,22.12 | v20.53,26.42 19.43,27.52 v18.63,27.52 | v3.13,3.72 U3.5
  Bottom 0.15: v24.03,22.12 24.03,25.02 22.63,26.42 v20.53,26.42 | v18.63,27.52 17.73,28.42 9.43,28.42 7.73,26.72 7.73,10.72 7.23,10.22 3.73,10.22 3.13,9.62 1.73,9.62 0.63,8.52 0.63,5.42 1.43,4.62 1.43,4.22 1.93,3.72 v3.13,3.72
D+  (via drill 0.3)
  Top 0.15: D3.4 30.73,17.1 v30.73,16.92 | v28.73,15.82 28.53,15.82 27.82,16.53 U1.P$AD6
  Bottom 0.15: v30.73,16.92 30.03,16.22 29.53,16.22 29.13,15.82 v28.73,15.82
D-  (via drill 0.35)
  Top 0.15: U1.P$AD4 28.78,15.02 30.03,15.02 30.73,14.32 v31.13,14.32 | v32.13,15.12 32.53,15.52 32.53,15.92 37.23,15.92 38.53,17.22 38.53,18.12 38.03,18.62 37.83,18.62 37.43,18.22 37.03,18.22 35.85,19.4 D3.6
  Bottom 0.15: v31.13,14.32 31.93,15.12 v32.13,15.12
DEC3  (via drill 0.35)
  Top 0.15: U1.P$D23 22.42,20.93 21.94,20.93 v21.73,20.72 | C11.1 18,22.35 v18.03,22.32
  Bottom 0.15: v21.73,20.72 20.53,21.92 19.43,21.92 19.03,22.32 v18.03,22.32
DEC4_6  (via drill 0.35)
  Top 0.15: U1.P$E24 22.73,21.57 22.92,21.82 C10.1 22.92,23.59 C15.1 22.76,23.76 21.99,23.76 21.83,23.92 v21.83,25.42 | C16.1 20.48,16.57 | 20.48,16.57 20.75,16.29 21.76,16.29 U1.P$B5 | L3.2 18.64,14.33 20.03,15.72 19.83,15.92 | 19.83,15.92 19.78,15.87 19.43,16.22 19.43,16.32 18.23,17.52 v18.23,17.62 | 19.83,15.92 20.48,16.57
  Bottom 0.15: v18.23,17.62 17.63,18.22 17.63,21.62 16.83,22.42 16.83,22.92 17.13,23.22 21.43,23.22 22.03,23.82 22.03,25.22 v21.83,25.42
DN  (via drill 0.35)
  Top 0.15: D3.1 34.93,22.42 34.43,22.92 32.33,22.92 31.83,22.42 28.63,22.42 28.33,22.72 28.33,24.82 26.03,27.12 23.93,27.12 23.53,27.52 23.53,28.94 J4.B7 23.58,29.57 24.03,30.02 v24.03,31.62 | J4.A7 22.58,30.37 22.43,30.52 v22.43,30.62
  Bottom 0.15: v22.43,30.62 23.33,31.52 23.93,31.52 v24.03,31.62
DP
  Top 0.15: D3.3 32.83,22.1 28.55,22.1 28.03,22.62 28.03,24.72 26.03,26.72 23.73,26.72 23.08,27.37 J4.A6 23.08,29.57 23.63,30.12 23.63,31.22 23.13,31.72 22.13,31.72 21.53,31.12 21.53,30.22 22.08,29.67 J4.B6
EPD_3V3  (via drill 0.35)
  Top 0.15: EPD_C5.2 13.01,25.14 v12.93,25.22 | v10.53,19.62 10.48,19.57 7.81,19.57 J1.16 J1.15
  Top 0.3: 16.18,4.17 15.76,4.59 C1-EP-DR.1 14.66,4.59 v13.83,5.42 | 16.18,4.17 16.63,3.72 | 16.18,4.17 16.74,4.17 17.11,3.8 | 17.11,3.8 L5.1 17.3,3.25 | Q1.3 38.65,3.8 v38.63,3.82 | v18.83,1.72 17.53,1.72 16.93,2.32 16.93,3.62 17.11,3.8
  Bottom 0.3: v13.83,5.42 13.43,5.82 13.43,8.22 10.83,10.82 9.83,10.82 9.53,11.12 9.53,18.62 v10.53,19.62 | v38.63,3.82 20.33,3.82 18.83,2.32 v18.83,1.72
  Power 0.3: v12.93,25.22 10.73,23.02 10.53,23.02 v10.53,19.62
EPD_BUSY  (via drill 0.35)
  Top 0.15: U1.P$AD12 28.12,18.03 28.33,17.82 v28.63,17.82 | v10.81,16.15 7.73,16.15 J1.9
  Bottom 0.15: v28.63,17.82 28.33,17.52 27.73,17.52 27.23,18.02 27.23,20.82 26.93,21.12 23.13,21.12 22.73,20.72 22.43,20.72 17.86,16.15 v10.81,16.15
EPD_CS  (via drill 0.35)
  Top 0.15: v12.33,15.42 12.33,16.82 11.48,17.67 J1.12
  Bottom 0.15: U1.P$K2 21.12,15.53 20.93,15.72 12.63,15.72 v12.33,15.42
  other vias: 24.02,15.53
EPD_DC  (via drill 0.35)
  Top 0.15: v11.33,15.42 12.03,16.12 10.83,17.32 7.86,17.32 J1.11 | U1.P$AD10 27.82,17.53 28.43,16.92 29.13,16.92 29.23,16.82 29.23,16.62 29.63,16.22 29.83,16.22 30.23,15.82 v31.23,15.82
  Bottom 0.15: v31.23,15.82 30.43,15.02 21.53,15.02 20.33,13.82 12.93,13.82 v11.33,15.42
EPD_RST  (via drill 0.35)
  Top 0.15: U1.P$AC11 27.97,17.78 28.53,17.22 28.83,17.22 29.73,18.12 v29.73,19.82 | v10.23,16.82 10.08,16.67 J1.10
  Power 0.15: v29.73,19.82 28.53,21.02 28.53,21.62 27.13,23.02 17.03,23.02 10.83,16.82 v10.23,16.82
GDR  (via drill 0.3, 0.35)
  Top 0.15: v19.17,11.86 18.92,11.61 18.63,11.61 | 18.63,11.61 18.58,11.61 Q3.1 | v11.33,12.62 11.28,12.67 J1.2 | R2_EP_DR.2 18.92,11.32 18.63,11.61
  Bottom 0.15: v19.17,11.86 18.61,12.42 11.53,12.42 v11.33,12.62
GND  (via drill 0.35)
  Top 0.15: R9.1 5.53,7.77 EPD_C1.1 4.71,7.82 EPD_C2.1 2.79,7.82 2.21,8.4 TP_BAT_GND.TP | IC3.8 IC3.9 | TP_GND.TP 37.06,30.97 C33.2 C25.2 35.33,30.95 v35.33,32.32 | 19.63,28.22 J4.A12_B1 19.09,28.99 J4.SH4 | 19.63,28.22 19.63,28.02 20.43,27.22 21.05,27.22 R2_USB.2 21.15,27.24 | 21.15,27.24 22.8,25.58 C15.2 | D4.1 3.91,31.02 2.33,31.02 1.13,29.82 1.13,27.02 2.73,25.42 v5.63,25.42 | J1.MP2 10.93,25.03 v10.93,25.22 11.53,25.82 13.43,25.82 13.63,25.62 14.93,25.62 15.13,25.42 15.13,25.22 | 31.43,30.26 30.48,30.26 C23.1 29.64,29.42 28.63,29.42 28.13,29.92 28.13,31.02 28.23,31.12 | 31.43,30.26 IC9.B1 IC9.C1 | C18.1 23.71,10.71 22.63,10.71 | 22.63,10.71 C17.1 22.63,10.63 | SJ1.1 19.47,9.69 R_TYPE_SEL.1 19.63,8.41 19.63,7.82 v19.73,7.72 | SW_UP.1 35.33,4.32 | 35.33,4.32 35.33,5.04 C30.2 36.18,5.87 36.93,5.12 36.93,3.02 39.03,0.92 41.43,0.92 41.63,1.12 42.03,1.12 43.23,2.32 43.23,6.82 40.93,9.12 40.93,9.62 40.08,10.47 J2.5 J2.3 | C24.1 29.09,31.97 | 29.09,31.97 27.34,33.72 J4.SH1 | 28.23,31.12 29.09,31.97 | SJ1.1 19.25,10.17 20.19,11.12 R2_EP_DR.1 | EPD_C8.2 14.73,20.5 EPD_C7.2 EPD_C6.2 | EPD_C8.2 15.08,21.67 15.63,21.12 15.63,19.72 16.33,19.02 17.63,19.02 17.93,19.32 17.93,20.57 C11.2 17.33,21.84 18.5,20.67 C1.2 | 20.03,19.83 C13.2 20.03,19.32 19.73,19.02 18.63,19.02 18.43,19.22 18.43,21 C1.2 | C2.2 21.83,22.39 | 21.83,22.39 22.35,22.39 C10.2 | C7.2 29.01,20.2 29.5,20.69 C8.2 30.46,19.95 C20.2 | C20.2 30.76,19.95 | 33.98,21.67 D3.2 33.98,21.47 34.63,20.82 v35.03,20.82 | 4.23,5.32 U3.6 4.8,5.25 5.03,5.49 C19.2 | C22.2 26.33,25.15 26.33,24.48 C4.2 26.66,24.15 C3.2 26.66,23.25 26.33,22.92 24.98,22.92 C9.2
  Top 0.15: C38.2 16.02,8.72 C39.2 | IC2.B3 42.61,26.42 43.03,26.42 43.44,26.83 C32.2 44.62,26.64 C34.2 v44.62,24.53 v44.63,24.52 | 35.43,17.87 C21.2 35.5,17.19 v35.23,16.92 | 28.23,31.12 26.83,31.12 26.43,30.72 26.43,29.39 J4.A1_B12 26.61,29.57 J4.SH3 | X1.4 18.87,25.06 19.63,25.82 20.73,25.82 21.43,25.12 21.43,22.79 21.83,22.39 | 15.13,25.22 15.03,25.12 14.5,25.12 EPD_C5.1 | 15.63,24.62 15.63,24.92 15.33,25.22 15.13,25.22 | EPD_C9.2 EPD_C8.2 | U1.P$80 24.44,18.21 | 24.44,18.21 U1.P$74 | U1.P$74 U1.P$85 | U1.P$81 23.92,18.73 24.44,18.21 | U1.P$75 22.07,16.48 U1.P$B7 21.71,16.72 21.09,16.72 20.7,17.11 C16.2 19.62,17.11 v19.53,17.02 | IC9.C3 IC9.C2 IC9.C1 | IC9.C1 | 31.43,30.26 31.33,30.16 v31.33,29.62 | IC2.B1 41.11,26.24 40.73,26.62 v40.78,26.67 | SW_ENT.1 24.43,4.29 | 24.43,4.29 25.06,4.29 27.13,2.22 v27.43,2.22 | v28.63,2.82 28.63,3.51 IC3.9 | IC3.9 28.53,3.82 v28.53,4.52 | v29.03,6.72 29.24,6.51 R3.2 | v36.33,4.52 36.13,4.32 35.33,4.32 | X1.2 20.22,23.71 19.07,24.86 X1.4 | X1.4 18.87,25.98 v17.93,26.92 17.93,27.72 18.43,28.22 19.63,28.22 | EPD_C11.2 15.93,25.72 v16.33,25.32 15.63,24.62 | 15.63,24.62 EPD_C10.2 | v15.23,27.52 15.14,27.61 EPD_C12.2 | v21.03,6.52 22.1,7.59 C31.2 | v23.93,5.32 24.43,4.82 24.43,4.29 | C1.2 18.8,21.07 19.11,21.38 C12.2 | J1.8 8.33,15.67 | 8.33,15.67 10.08,15.67 11.23,14.52 12.43,14.52 12.83,14.12 12.83,11.12 v12.43,11.12 | J1.MP1 10.13,11.6 10.13,12.02 v10.23,12.12 | v12.53,10.02 v12.52,10.02 C42.2 | C20.2 31.2,19.95 v31.73,19.42 | SJ1.1 18.45,10.72 v18.23,10.72 | v22.63,9.72 22.63,10.71 | v8.63,20.12 7.76,20.12 J1.17 | v8.53,15.02 8.33,15.22 8.33,15.67 | R1_USB.1 25.11,27.64 v25.13,27.62
  Top 0.15: v21.83,27.62 21.83,27.72 21.63,27.72 21.15,27.24 | 25.72,18.28 U1.P$88 | U1.P$74 U1.P$84 U1.P$83 | U1.P$74 25.72,18.28 | 25.72,18.28 U1.P$89 | U1.P$74 U1.P$90 | C5.2 20.03,14.32 | 20.03,14.32 | 20.03,14.32 v20.03,14.42 | v18.73,15.22 18.73,16.12 v18.83,16.22 | C6.2 27.63,14.03 v27.63,14.22 | v26.43,13.42 C43.2
  Top 0.152: 2.21,8.4 1.41,8.4 0.83,7.82 0.83,7.32 1.9,6.25 U3.1 2.6,6.25 3.18,5.67 U3.9 | C29.2 12.38,5.22 12.73,5.22 13.33,4.62 | 13.33,4.62 13.33,4.42 | U3.4 3.06,4.75 3.23,4.92 3.23,5.45 U3.9 | C19.2 6.61,5.49 C37.2 | C37.2 6.82,4.47 C14.2 7.23,3.22 7.13,3.12 v7.13,3.02 | 13.33,4.42 SW_DN.1 13.33,4.12 12.43,3.22 v12.23,3.22 | 13.33,4.62 13.33,5.92 13.53,6.12 15.18,6.12 C1-EP-DR.2 14.33,6.97 v14.33,7.42 | U3.9 3.43,5.25 U3.6 | C37.2 6.13,5.97 6.13,6.52 6.53,6.92 7.74,6.92 7.78,6.96 IC1.D2 | v17.33,8.82 16.12,8.82 C39.2 | 13.43,4.32 13.33,4.42
  Top 0.3: U1.P$F23 23.02,20.38 U1.P$78
  Bottom 0.15: U1.P$80 U1.P$76 U1.P$77 | v31.33,29.62 33.93,29.62 34.53,30.22 34.53,32.12 34.73,32.32 v35.33,32.32 | v40.78,26.67 40.78,25.17 42.13,23.82 44.43,23.82 44.63,24.02 v44.63,24.52 | v27.43,2.22 28.23,3.02 28.63,3.02 v28.63,2.82 | v28.53,4.52 29.23,5.22 29.23,6.12 | 29.23,6.12 29.23,6.52 v29.03,6.72 | 29.23,6.12 30.53,6.12 31.63,5.02 35.83,5.02 v36.33,4.52 | v17.93,26.92 17.48,26.47 | 17.48,26.47 v16.33,25.32 | 17.48,26.47 16.28,26.47 v15.23,27.52 | v19.73,7.72 20.93,6.52 v21.03,6.52 22.23,5.32 v23.93,5.32 | v10.23,12.12 10.43,12.12 11.43,11.12 v12.43,11.12 12.43,10.02 v12.53,10.02 | v35.03,20.82 34.93,20.72 34.93,20.42 34.33,19.82 32.13,19.82 v31.73,19.42 31.53,19.22 29.53,19.22 29.33,19.42 29.13,19.42 28.63,18.92 28.63,18.62 29.13,18.12 29.43,18.12 31.43,18.12 32.63,16.92 v35.23,16.92 | v18.23,10.72 19.33,9.62 22.53,9.62 v22.63,9.72 | v8.63,20.12 8.63,15.02 v8.53,15.02 | v25.13,27.62 v21.83,27.62 | v20.03,14.42 19.53,14.42 v18.73,15.22 | v27.63,14.22 26.83,13.42 v26.43,13.42
  Bottom 0.152: v14.33,7.42 14.93,6.82 16.23,6.82 | 16.23,6.82 17.33,7.92 v17.33,8.82 | 16.23,6.82 16.43,6.82 17.23,6.02 18.83,6.02 19.73,6.92 v19.73,7.72 | v7.13,3.02 7.83,3.72 11.73,3.72 v12.23,3.22
  Power 0.15: v5.63,25.42 10.73,25.42 v10.93,25.22 | v18.83,16.22 18.83,16.32 v19.53,17.02
  pour Top: -0.07,37.32 -0.07,-1.18 47.43,-1.18 47.93,-0.68 47.93,35.32 45.93,37.32
  pour Bottom: -0.07,37.82 -0.07,-0.68 45.93,-0.68 47.43,0.82 47.43,36.82 0.93,36.82
  pour GND: -0.57,36.32 45.93,36.32 46.43,35.82 46.43,-1.18 -0.57,-1.18
HAPTIC_EN  (via drill 0.35)
  Top 0.15: v40.23,28.52 41.43,27.32 IC2.A1 | v25.03,8.62 25.03,9.22 26.73,10.92 27.63,10.92 28.23,11.52 28.23,12.02 27.53,12.72 27.43,12.72 27.23,12.92 27.23,13.92 26.68,14.47 26.33,14.47 U1.P$U1
  Bottom 0.15: v40.23,28.52 40.23,24.52 39.23,23.52 39.23,19.12 28.63,8.52 28.63,7.12 26.53,7.12 v25.03,8.62
IMU_INT1  (via drill 0.35)
  Top 0.15: IC3.5 27.41,4.64 26.73,5.32 v26.73,9.82 | v26.93,12.42 26.93,13.82 26.63,14.12 25.93,14.12 25.53,13.72 24.87,14.38 24.87,14.93 U1.P$N1
  Bottom 0.15: v26.73,9.82 26.73,10.82 26.93,11.02 v26.93,12.42
IMU_INT2  (via drill 0.35)
  Top 0.15: IC3.6 27.31,4.14 26.13,5.32 26.13,6.22 v25.43,6.92
  Bottom 0.15: v25.43,6.92 24.33,8.02 24.33,10.02 23.33,11.02 23.33,13.92 23.63,14.22 24.73,14.22 26.03,12.92 28.73,12.92 31.03,15.22 31.53,15.22 31.83,15.52 31.83,16.42 31.63,16.62 31.33,16.62 31.13,16.42 30.73,16.42 30.23,15.92 29.63,15.92 29.03,15.32 25.43,15.32 25.22,15.53 U1.P$P2
  other vias: 25.02,15.53
LX1
  Top 0.15: L7.1 31.49,31.96 32.13,31.32 33.43,31.32 33.83,30.92 33.83,30.42 33.67,30.26 IC9.B3 IC9.B2
LX2
  Top 0.15: L7.2 33.55,31.6 34.13,31.02 34.13,30.02 33.57,29.46 IC9.D3 IC9.D2
MOSI
  Top 0.15: U1.P$B13 20.97,18.28 20.68,18.57 7.81,18.57 J1.14
N$1
  Top 0.15: R4.1 37.34,25.06 37.34,25.16 34.38,28.12 32.33,28.12 31.73,28.72 31.73,29.12 32.07,29.46 IC9.D1
N$2
  Top 0.15: R2.1 38.27,24.78 34.63,28.42 32.75,28.42 32.23,28.94 IC9.E1
N$3
  Top 0.15: C5.1 21.69,14.32 22.27,14.9 U1.P$C1
N$4  (via drill 0.3, 0.35)
  Top 0.15: C20.1 30.43,18.52 30.43,17.52 v29.73,16.82
  Bottom 0.15: v29.73,16.82 29.23,16.32 27.31,16.32 U1.P$AC5
  other vias: 27.27,16.28
N$5
  Top 0.15: U1.P$H23 23.42,21.13 23.42,22.31 24.65,23.54 L1.1 25.02,23.48 C3.1
N$6  (via drill 0.3)
  Top 0.15: ANT1.1 44.07,21.98 42.53,23.52 v30.53,23.52 | L1.2 26.44,25.91 26.81,25.54 C22.1 27.04,24.95 C4.1 27.53,23.79 v27.53,23.42
  Bottom 0.15: v30.53,23.52 30.33,23.32 27.63,23.32 v27.53,23.42
N$7
  Top 0.15: R9.2 5.78,7.26 IC1.D1
N$8
  Top 0.15: X1.1 19.03,23.55 19.03,22.22 | 19.03,22.22 19.33,21.92 21.38,21.92 U1.P$B24 | C1.1 18.5,21.69 19.03,22.22
N$9  (via drill 0.35)
  Top 0.15: C2-EP-DR.2 6.13,30.57 6.13,31.92 8.13,33.92 16.43,33.92 16.83,33.52 16.83,32.22 16.46,31.85 D5.2 15.28,29.77 17.23,27.82 17.23,23.22 17.03,23.02 16.33,23.02 15.93,22.62 15.93,20.62 16.83,19.72 v16.83,19.62 | v12.83,17.42 13.23,17.02 13.23,13.62 13.93,12.92 | 13.93,12.92 14.59,12.26 Q3.3 | L5.2 17.3,6.79 v17.33,6.82 | v13.93,11.82 13.93,12.92
  Bottom 0.15: v16.83,19.62 14.93,17.72 13.13,17.72 v12.83,17.42 | v17.33,6.82 18.43,7.92 18.43,9.02 16.83,10.62 15.13,10.62 v13.93,11.82
N$10  (via drill 0.35)
  Top 0.15: X1.3 20.99,24.86 21.05,24.8 C2.1 21.02,22.42 v20.23,22.42 | v22.26,21.5 21.98,21.22 21.46,21.22 U1.P$A23
  Bottom 0.15: v20.23,22.42 20.43,22.62 22.33,22.62 22.73,22.22 22.73,21.82 22.41,21.5 v22.26,21.5
N$11
  Top 0.15: L2.1 15.56,13.42 18.33,13.42 18.93,14.02 18.93,14.22 20.49,15.78 U1.P$B3
N$12
  Top 0.15: C13.1 21.24,19.56 U1.P$A18
N$13
  Top 0.15: L2.2 17.08,16.26 L3.1
N$14
  Top 0.15: D4.2 5.05,27.41 C2-EP-DR.1 7.73,27.67 D2.1
N$15
  Top 0.3: C9.1 24.78,21.54 U1.P$N24
N$17
  Top 0.15: EPD_C1.2 5.61,9.92 10.33,9.92 12.43,12.02 12.43,14.02 12.28,14.17 J1.5
N$18
  Top 0.15: R1_EP_DR.1 20.67,12.67 20.67,10.02 SJ1.2 20.78,9.91 20.78,9.32 R_TYPE_SEL.2
N$19
  Top 0.15: EPD_C2.2 3.26,9.25 4.23,10.22 10.23,10.22 11.93,11.92 11.93,13.72 7.76,13.72 J1.4
N$20
  Top 0.15: IC2.A2 41.93,27.32 42.74,28.13 C32.1
N$21
  Top 0.15: R3.1 29.59,5.52 IC3.1
N$22
  Top 0.15: EPD_C6.1 12.81,19.35 11.91,20.25 9.7,20.25 9.28,20.67 J1.18
N$23
  Top 0.15: EPD_C7.1 13.31,20.58 9.92,20.58 9.33,21.17 | 9.38,21.17 9.33,21.17 | 9.33,21.17 J1.19
N$24
  Top 0.15: 13.23,21.67 | J1.20 9.38,21.67 10.03,21.02 12.23,21.02 12.89,21.67 13.23,21.67 | EPD_C8.1 13.23,21.67
N$25
  Top 0.15: J4.A5 24.08,27.7 R1_USB.2
N$26
  Top 0.15: EPD_C10.1 13.16,24.25 10.93,22.02 10.03,22.02 9.38,22.67 J1.22
N$27
  Top 0.15: R2_USB.1 21.09,28.98 J4.B5
N$28
  Top 0.15: J1.24 7.71,23.77 10.86,26.92 11.44,26.92 EPD_C12.1
OUT+  (via drill 0.35)
  Top 0.15: TP_OP.TP 43.53,30.83 v43.53,30.42 | v43.43,27.62 42.55,26.74 IC2.A3
  Bottom 0.15: v43.53,30.42 43.43,30.32 v43.43,27.62
OUT-  (via drill 0.35)
  Top 0.15: TP_ON.TP 40.53,30.73 40.53,30.72 v40.63,30.72 | v43.43,26.02 43.15,25.74 IC2.C3
  Bottom 0.15: v40.63,30.72 42.63,28.72 42.63,27.32 43.43,26.52 v43.43,26.02
P0.00/XL1
  Top 0.15: U1.P$D2 22.63,15.43 22.63,14.02 22.43,13.82 22.43,13.42 21.59,12.58 X2.1 21.77,12.28 22.03,12.02 22.04,12.01 C17.2
P0.01/XL2
  Top 0.15: U1.P$F2 22.92,15.43 22.92,13.53 24.09,12.36 | 24.09,12.36 24.43,12.02 24.38,11.97 24.43,11.92 24.25,11.74 C18.2 | X2.2 24.09,12.36
P0.13
  Top 0.15: 27.82,17.03 U1.P$AD8 27.92,17.03 28.33,16.62 28.83,16.62 30.53,14.92 31.33,14.92 31.66,14.59 31.66,12.06 R5.1 30.86,11.46 30.43,11.03 30.43,6.39 32.27,4.56 | SW_UP.2 32.27,4.56 | C30.1 33.58,5.87 32.27,4.56
P0.14  (via drill 0.2, 0.35)
  Top 0.15: SW_ENT.2 21.53,5.62 21.95,6.04 | v28.93,10.42 26.63,10.42 25.73,9.52 25.73,8.32 24.33,6.92 23.03,6.92 | 21.95,6.04 22.63,6.72 22.83,6.72 23.03,6.92 | 21.95,6.04 R8.1 | C31.1 23.4,7.29 23.03,6.92
  Bottom 0.15: v28.93,10.42 31.33,12.82 31.33,13.52 32.83,15.02 32.83,16.12 31.53,17.42 29.53,17.42 29.13,17.02 29.13,16.72 29.03,16.62 27.73,16.62 27.27,17.08 U1.P$AC9
  other vias: 27.27,17.28
P1.01
  Top 0.15: Q1.1 42.4,1.89 41.93,1.42 39.03,1.42 37.23,3.22 37.23,5.32 37.73,5.82 37.73,6.62 37.33,7.02 34.23,7.02 32.63,5.42 31.83,5.42 30.73,6.52 30.73,9.46 R_PWR_EPD.1
P1.02
  Top 0.15: SW_DN.2 10.49,4.33 C29.1 10.49,6.73 R7.1
PMIC_INT  (via drill 0.35)
  Top 0.15: IC1.A1 7.38,8.66 7.64,8.92 10.43,8.92 12.13,10.62 13.13,10.62 13.63,11.12 15.13,11.12 16.23,12.22 18.43,12.22 19.03,12.82 19.43,12.82 v20.13,12.12 | U1.P$T2 v25.53,14.52
  Bottom 0.15: v20.13,12.12 20.13,12.82 21.13,13.82 22.63,13.82 23.33,14.52 v25.53,14.52
PREVGH
  Top 0.15: J1.21 9.48,22.17 9.53,22.12 9.53,22.02 10.23,21.32 11.63,21.32 11.63,21.82 12.63,22.82 EPD_C9.1 13.43,23.02 13.93,23.52 16.53,23.52 16.53,23.62 16.93,24.02 16.93,26.72 16.53,27.12 16.53,28.02 15.83,28.72 12.63,28.72 11.78,29.57 D5.1
PREVGL
  Top 0.15: J1.23 8.28,23.17 8.53,23.42 8.53,24.02 11.03,26.52 13.13,26.52 13.37,26.28 EPD_C11.1 14.63,26.32 15.33,27.02 15.83,27.02 16.03,27.22 16.03,28.02 15.63,28.42 11.73,28.42 D2.2
RESE  (via drill 0.3, 0.35)
  Top 0.15: Q3.2 17.18,13.12 19.43,13.12 v19.63,13.32 19.77,13.32 R1_EP_DR.2 | J1.3 7.76,13.22 v10.43,13.22
  Bottom 0.15: v19.63,13.32 19.53,13.22 v10.43,13.22
RESET  (via drill 0.35)
  Top 0.15: TP_RESET.TP 41.04,21.43 | 41.04,21.43 42.03,20.44 42.03,14.42 40.08,12.47 J2.6 | U1.P$AC13 28.79,18.28 v29.23,18.72 | v36.03,21.32 37.83,21.32 39.73,19.42 v39.73,19.12 | v42.33,22.72 41.13,22.72 40.43,22.02 40.43,21.72 40.72,21.43 41.04,21.43
  Bottom 0.15: v29.23,18.72 34.13,18.72 36.03,20.62 v36.03,21.32 | v39.73,19.12 40.13,19.52 42.33,19.52 42.93,20.12 42.93,22.12 v42.33,22.72
SCK
  Top 0.15: J1.13 7.81,18.27 20.28,18.27 20.73,17.82 21.06,17.82 U1.P$A12
SCL  (via drill 0.3, 0.35)
  Top 0.15: R4.2 36.59,24.82 | 36.59,24.82 36.59,24.16 v36.63,24.12 | v24.73,13.52 24.53,13.72 U1.P$M2 | R17.2 36.11,24.82 36.13,24.82 | 36.13,24.82 36.59,24.82 | IC2.C1 41.41,25.72 v39.63,25.72 | IC3.12 29.65,4.64 30.03,5.02 30.03,6.92 28.93,8.02 28.93,9.72 28.73,9.92 v27.93,9.92 | U3.7 4.66,5.75 v5.23,6.32 | v7.23,9.22 6.93,9.22 | 6.93,9.22 6.53,8.82 6.53,8.52 6.99,8.06 IC1.B1 | TP_SCL.TP 36.12,24.81 36.13,24.82 | 6.93,9.22 7.13,9.42 v10.03,9.42
  Bottom 0.15: v36.63,24.12 36.63,23.42 | 36.63,23.42 36.63,17.32 28.63,9.32 26.93,9.32 | 26.93,9.32 26.53,9.32 24.73,11.12 v24.73,13.52 | v39.63,25.72 38.68,24.77 | 38.68,24.77 37.33,23.42 36.63,23.42 | v27.93,9.92 27.53,9.92 26.93,9.32 | v5.23,6.32 5.53,6.62 6.43,6.62 6.73,6.92 6.73,8.82 7.13,9.22 v7.23,9.22 | v10.03,9.42 9.13,10.32 9.13,20.92 9.63,20.42 12.63,20.42 20.33,28.12 33.83,28.12 35.03,29.32 37.73,29.32 38.68,28.37 38.68,24.77
SDA  (via drill 0.3, 0.35)
  Top 0.15: v38.83,24.02 38.84,24.03 R2.2 38.87,24.81 | U1.P$L1 23.73,14.49 23.73,13.72 v23.83,13.62 | 38.87,24.81 R18.2 38.64,27.62 TP_SDA.TP | IC2.B2 41.63,25.94 41.63,24.42 39.26,24.42 38.87,24.81 | IC3.2 28.74,6.31 28.18,6.87 | v27.93,7.72 27.93,7.22 28.28,6.87 28.18,6.87 | U3.8 4.16,6.35 4.06,6.45 3.3,6.45 2.93,6.82 2.03,6.82 1.63,7.22 v1.63,7.62 | v5.73,8.82 6.89,7.66 IC1.C1 | v27.33,6.62 27.58,6.87 28.18,6.87
  Bottom 0.15: v38.83,24.02 38.83,19.12 28.63,8.92 27.83,8.92 | 27.83,8.92 26.43,8.92 23.83,11.52 v23.83,13.62 | v27.93,7.72 27.93,8.82 27.83,8.92 | v1.63,7.62 1.63,8.52 2.03,8.92 4.13,8.92 | 4.13,8.92 5.63,8.92 v5.73,8.82 | 4.13,8.92 4.13,9.32 4.63,9.82 8.23,9.82 13.53,4.52 24.13,4.52 26.23,6.62 v27.33,6.62
SWDCLK  (via drill 0.35)
  Top 0.15: 38.48,12.07 J2.4 37.83,13.04 37.83,15.62 40.09,17.88 TP_SWDCLK.TP 40.77,19.38 39.63,20.52 39.63,22.02 38.43,23.22 31.73,23.22 v31.43,22.92 | v26.93,22.22 26.93,21.72 26.77,21.56 U1.P$AA24
  Bottom 0.15: v31.43,22.92 27.63,22.92 v26.93,22.22
SWDIO
  Top 0.15: J2.2 37.18,12.07 36.83,12.42 34.93,12.42 33.93,13.42 33.93,15.12 34.33,15.52 37.23,15.52 39.13,17.42 39.13,18.08 TP_SWDIO.TP 37.19,20.02 35.63,20.02 35.43,20.22 34.43,20.22 34.33,20.32 34.33,20.72 34.13,20.92 32.73,20.92 32.13,21.52 30.53,21.52 30.23,21.82 27.56,21.82 U1.P$AC24
SWO  (via drill 0.35)
  Top 0.15: TP_SWO.TP 29.64,26.83 v29.33,26.52 | U1.P$AD22 27.18,21.12 26.83,21.12 26.53,21.42 26.53,21.82 25.93,22.42 v25.53,22.42
  Bottom 0.15: v29.33,26.52 28.03,25.22 26.03,25.22 25.13,24.32 25.13,23.52 25.53,23.12 v25.53,22.42
VBAT  (via drill 0.35)
  Top 0.3: 8.33,6.22 8.33,6.12 8.12,5.91 C37.1 9.03,4.37 9.03,3.92 7.84,2.73 TP_VBAT.TP | 8.33,6.22 8.33,6.32 v7.13,6.32 | IC1.C2 7.99,7.66 9.03,6.62 9.03,6.22 8.33,6.22 | C27.1 2.35,3 1.13,4.22 1.13,4.82 1.56,5.25 U3.3 U3.2 1.16,5.75 v1.13,5.72
  Power 0.3: v1.13,5.72 1.03,5.82 1.03,6.52 1.43,6.92 4.83,6.92 5.03,7.12 6.33,7.12 v7.13,6.32
VBUS  (via drill 0.3, 0.35)
  Top 0.3: 13.03,9.72 13.73,10.62 17.13,10.62 18.13,9.62 18.13,8.22 19.43,6.92 20.03,6.92 21.03,7.92 21.03,8.42 21.13,8.52 22.93,8.52 25.48,11.07 C43.1 26.08,11.77 27.58,11.77 v27.63,11.82 | 13.03,9.72 12.1,8.5 C42.1 7.76,8.5 7.81,8.49 IC1.A2 | v32.73,17.52 33.92,17.52 C21.1 34,17.8 33.98,17.82 D3.5 33.98,20.27 33.73,20.52 v32.13,20.52 | v29.83,12.02 30.83,13.02 30.83,13.72 29.93,14.62 28.68,14.62 U1.P$AD2 | v29.83,24.92 26.83,27.92 25.83,27.92 25.23,28.52 J4.A4_B9 25.23,29.49 24.83,29.89 24.83,31.92 24.53,32.22 22.1,32.22 20.63,30.75 20.63,30.37 20.81,30.19 20.81,29.89 20.43,29.51 J4.A9_B4 | 13.03,9.72 14.66,9.72 C38.1
  Power 0.3: v27.63,11.82 27.63,12.72 28.13,13.22 28.63,13.22 v29.83,12.02 30.63,12.02 33.23,14.62 33.23,17.02 v32.73,17.52 | v32.13,20.52 29.83,22.82 v29.83,24.92
VREG  (via drill 0.35)
  Top 0.3: IC1.B2 8.69,8.06 9.03,7.72 11.93,7.72 12.63,8.42 14.42,8.42 C39.1 v15.72,7.52 17.83,7.52 19.53,5.82 19.53,5.62 19.76,5.39 TP2.TP | C24.2 30.35,30.64 C23.2 30.43,30.68 | 30.43,30.68 32.21,30.68 IC9.A1 IC9.A2 IC9.A3 | v29.83,33.42 30.43,32.82 30.43,30.68
  GND 0.3: v15.72,7.52 v15.73,7.52
  Power 0.3: v15.72,7.52 15.72,8.93 14.62,8.93 13.23,10.32 13.23,12.12 12.73,12.62 12.43,12.62 10.83,14.22 10.43,14.22 8.63,16.02 8.63,17.02 10.13,18.52 11.33,18.52 17.53,24.72 19.83,24.72 21.98,26.87 22.08,26.87 24.83,29.62 24.83,31.72 25.33,32.22 28.63,32.22 v29.83,33.42